# Altium PCB MADI_nRF52840_PCB_L4.PcbDoc (part 3 of 3)
Units mm, origin at the board's own origin, x right, y up, seen from the top; angles counter-clockwise.
Board outline 30 x 21.59 mm, 4 copper layers (L1, L2 (GND), L3 (GND), L4), stack 1.525 mm thick; 59 components, 58 nets, 307 pads, 195 vias.
Unrouted connection lines stored in the file: 114.
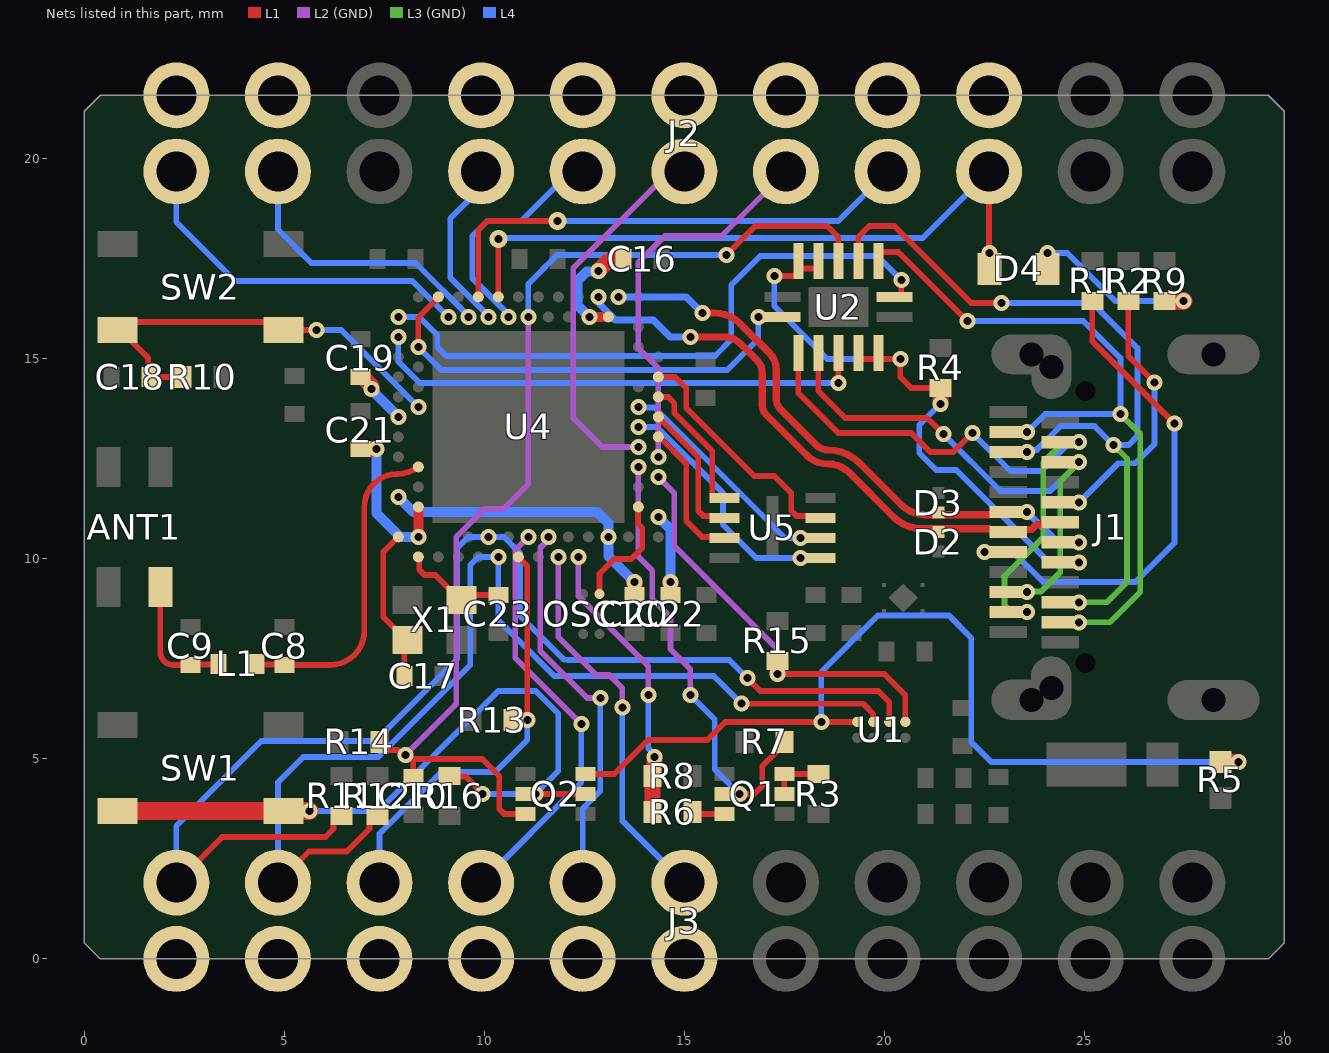
[diagram p4: the nets of this part, all layers, seen from the top]

## Via types
v1: diameter 0.4, hole 0.2, L1 to L4, tented both sides, 193 vias
v2: diameter 0.45, hole 0.2, L1 to L4, tented both sides, 2 vias

## Nets (pads, with @x,y where several pads share a name; then routed paths per layer and width w, separated by ;. In a path a pad name is that pad's centre, name@x,y a point inside that pad or via, vN(x,y) a via of type N, cw(c..) or ccw(c..) an arc to the next point about the centre after c; other vN are vias at no path point) (continued)
MR: Q2.6 R5.2 U1.D1 | length 23.1
  L1 w0.146: Q2.6@12.525,4.625 13.25,4.625 14.1,5.475 15.575,5.475 16.025,5.925 U1.D1@19.325,5.925
  L1 w0.4: R5.2@28.4,4.925 v1(28.85,4.925)
  L4 w0.146: v1(18.425,5.925) 18.425,7.172 19.842,8.589 21.611,8.589 22.175,8.025 22.175,5.425 22.675,4.925 v1(28.85,4.925)
NetANT1_1: ANT1.1 C9.2 L1.2 | length 3.3
  L1 w0.146: ANT1.1@1.9,9.295 1.9,7.675 ccw(c2.225,7.675) 2.225,7.35 C9.2@2.65,7.35 2.662,7.362 3.337,7.362 L1.2@3.35,7.375
NetC8_2: C8.2 L1.1 U4.H23 | length 8.1
  L1 w0.146: L1.1@4.3,7.375 4.312,7.362 C8.2@4.962,7.362 ; C8.2@5,7.35 6.15,7.35 ccw(c6.15,8.2) 7,8.2 7,11.3 cw(c7.825,11.3) 7.242,11.884 cw(c7.825,11.3) 7.825,12.125 ccw(c7.821,13.002) 8.242,12.233 cw(c8.436,11.883) 8.29,12.256 ccw(c8.236,12.391) 8.346,12.295 U4.H23@8.35,12.3
NetC16_2: C16.2 U4.AC5 | length 2.9
  L1 w0.25: v1(12.625,16.05) U4.AC5@13.1,16.05
  L1 w0.4: v1(12.85,17.2) 13.1,17.45 13.475,17.45 C16.2@13.475,17.5
  L4 w0.25: v1(12.625,16.05) 12.325,16.35 12.325,16.95 12.556,17.181 12.831,17.181 v1(12.85,17.2)
NetC17_1: C17.1 U4.B24 X1.1 | length 3.9
  L1 w0.146: U4.B24@7.85,10.55 7.475,10.175 7.475,8.55 8.05,7.975 X1.1@8.075,7.975 8,7.9 C17.1@8,7.075
NetC19_2: C19.2 U4.N24 | length 1.4
  L1 w0.4: C19.2@6.9,14.55 6.95,14.55 7.175,14.325 v1(7.175,14.25)
  L4 w0.25: v1(7.175,14.25) 7.175,14.237 7.85,13.562 v1(7.85,13.55)
NetC20_2: C20.2 U4.B5 U4.E24 | length 7.6
  L1 w0.4: C20.2@13.75,9.1 v1(13.75,9.425)
  L4 w0.25: v1(7.85,11.55) 8.225,11.175 12.825,11.175 13.1,10.9 13.1,10.075 v1(13.75,9.425)
  other v1: 13.1,10.55
NetC21_2: C21.2 U4.D23 | length 4
  L1 w0.25: v1(8.35,10.55) U4.D23@8.35,11.3
  L1 w0.4: C21.2@6.9,12.75 v1(7.3,12.75)
  L4 w0.25: v1(7.3,12.75) 7.3,11.15 7.9,10.55 v1(8.35,10.55)
NetC22_2: C22.2 U4.C1 | length 2.1
  L1 w0.4: C22.2@14.65,9.1 v1(14.65,9.425)
  L4 w0.25: v1(14.35,11.05) 14.65,10.75 v1(14.65,9.425)
NetC23_1: C23.1 U4.A23 X1.3 | length 2.7
  L1 w0.146: U4.A23@8.35,10.05 8.374,10.026 8.374,9.726 8.5,9.6 8.775,9.6 9.4,8.975 X1.3@9.425,8.975 9.55,9.1 C23.1@10.35,9.1
NetD4_A: D4.A R9.1 | length 4.2
  L1 w0.45: R9.1@27,16.45 v1(27.475,16.45)
  L4 w0.146: v1(24.075,17.65) 24.575,17.65 25.775,16.45 v1@27.35,16.45
NetJ1_A5: J1.A5 R1.2 | length 12.4
  L1 w0.146: R1.2@25.2,16.45 25.2,15.441 27.251,13.39 v1(27.256,13.39)
  L4 w0.146: v1(22.506,10.17) 23.226,10.17 23.971,9.425 26.275,9.425 27.256,10.406 v1(27.256,13.39)
NetJ1_B5: J1.B5 R2.2 | length 6.3
  L1 w0.146: R2.2@26.1,16.45 26.1,15.071 v1(26.756,14.415)
  L4 w0.146: v1(24.87,11.415) 25.845,12.39 26.281,12.39 26.756,12.865 v1(26.756,14.415)
NetOSC1_2: OSC1.2 U4.D2 | length 2.9
  L1 w0.146: OSC1.2@12.88,9.125 12.88,9.63 13.25,10 13.675,10 13.95,10.275 13.95,10.775 13.85,10.875 U4.D2@13.85,11.3
NetQ1_3: Q1.3 R6.2 | length 0.8
  L1 w0.146: R6.2@15.2,3.675 15.25,3.625 Q1.3@16,3.625
NetQ1_5: Q1.5 Q1.6 R3.1 | length 1.3
  L1 w0.146: Q1.5@17.5,4.125 Q1.6@17.5,4.625 R3.1@18.35,4.625
NetQ2_2: Q2.2 Q2.5 R16.2 SW1.1 SW1.2 | length 18.4
  L1 w0.146: R16.2@9.125,4.575 9.137,4.563 9.537,4.563 9.95,4.15 v1(9.95,4.125) ; v1(11.275,4.125) Q2.5@12.525,4.125
  L1 w0.45: SW1.2@0.825,3.7 SW1.1@4.975,3.7 v1(5.625,3.7)
  L4 w0.146: v1(5.625,3.7) 7.35,3.7 10.35,6.7 11.287,6.7 11.85,6.137 11.85,4.7 v1(11.275,4.125) v1(9.95,4.125)
nRESET: C10.2 Q2.3 R14.1 U2.4 U4.AC13 | length 27.8
  L1 w0.146: R14.1@7.375,5.425 7.375,5.375 7.525,5.225 7.832,5.225 7.957,5.1 8.05,5.1 8.225,4.925 ; C10.2@8.225,4.55 8.225,5 9.95,5 10.375,4.575 10.375,3.75 10.5,3.625 Q2.3@11.025,3.625 ; v1(16.05,17.6) 16.775,18.325 18.575,18.325 18.85,18.05 U2.4@18.85,17.45
  L2 (GND) w0.146: v1(8.025,5.1) 9.3,6.375 9.3,10.55 10,11.25 10.475,11.25 11.1,11.875 v1(11.1,16.05)
  L4 w0.146: v1(11.1,16.05) 11.1,16.875 11.45,17.225 11.45,17.23 11.67,17.45 11.675,17.45 11.825,17.6 v1(16.05,17.6)
nRESET_SW: J1.A10 J1.B10 U2.3 | length 19.4
  L1 w0.146: U2.3@19.35,17.45 19.35,18.05 19.625,18.325 20.25,18.325 22.175,16.4 v1(22.925,16.4)
  L3 (GND) w0.146: v1(24.87,8.915) 25.565,8.915 26.066,9.416 26.066,12.51 v1(25.731,12.845)
  L4 w0.146: v1(22.925,16.4) 25.2,16.4 26.326,15.274 26.326,13.064 26.106,12.845 v1(25.731,12.845) 25.256,13.32 24.406,13.32 23.813,12.727 23.622,12.727 v1(23.57,12.675)
P0.03/SPI_MOSI: J3.8 U4.B13 | length 10.6
  L2 (GND) w0.146: v1(11.1,10.55) 10.775,10.225 10.775,7.525 v1(12.425,5.875)
  L4 w0.146: J3.8@10.054,1.905 J3.8@9.92,1.905 12.425,4.41 v1(12.425,5.875)
P0.04/AIN2: J2.5 U4.J1 | length 9.7
  L2 (GND) w0.146: v1(14.35,12.55) 14.35,14.774 13.85,15.274 13.85,17.412 14.513,18.075 15.93,18.075 J2.5@17.54,19.685
P0.05/AIN3: J2.6 U4.K2 | length 9.4
  L2 (GND) w0.146: v1(13.85,12.8) 12.95,12.8 12.225,13.525 12.225,17.275 14.635,19.685 J2.6@15,19.685
P0.19: J2.7 U4.AC15 | length 5.8
  L4 w0.146: v1(10.6,16.05) 10.6,16.116 9.7,17.016 9.7,18.075 10.075,18.45 10.925,18.45 12.16,19.685 J2.7@12.46,19.685
P0.20: D4.K J2.3 U4.AD16 | length 16.5
  L1 w0.146: U4.AD16@10.35,16.55 v2(10.35,18) ; v1@22.6,17.65 22.62,17.67 J2.3@22.62,19.685
  L4 w0.146: v2(10.35,18) 10.375,18.025 20.96,18.025 J2.3@22.62,19.685
  other v1: 22.625,17.65
P0.21: J2.8 U4.AC17 | length 4.3
  L4 w0.146: J2.8@9.92,19.685 9.92,19.279 9.15,18.509 9.15,17.03 10.1,16.08 v1(10.1,16.05)
P0.22: J2.4 U4.AD18 | length 12.5
  L1 w0.146: U4.AD18@9.85,16.55 9.85,18.225 10.075,18.45 v2(11.825,18.45)
  L4 w0.146: v2(11.825,18.45) 18.845,18.45 J2.4@20.08,19.685
P0.23/UART_TX: J2.10 U4.AC19 | length 7.1
  L4 w0.146: J2.10@4.84,19.685 4.84,18.235 5.675,17.4 8.28,17.4 9.6,16.08 v1(9.6,16.05)
P0.25/UART_RX: J2.11 U4.AC21 | length 9
  L4 w0.146: J2.11@2.3,19.685 2.3,18.425 3.775,16.95 8.2,16.95 v1(9.1,16.05)
P0.26/nIRQ_BQ: R15.1 U1.A1 U4.G1 | length 10.6
  L1 w0.146: v1(17.325,7.125) 20,7.125 20.525,6.6 U1.A1@20.525,5.925
  L1 w0.4: v1(17.325,7.125) R15.1@17.325,7.45
  L2 (GND) w0.146: v1(14.35,12.05) 14.75,11.65 14.75,10.325 17.325,7.75 v1(17.325,7.125)
P0.27/EN_VBAT_MON: Q1.2 R7.2 U4.H2 | length 11.6
  L1 w0.146: v1(16.375,4.125) 16.75,4.125 16.95,4.325 16.95,4.825 17.5,5.375 R7.2@17.5,5.425
  L1 w0.35: Q1.2@16,4.125 v1(16.375,4.125)
  L2 (GND) w0.146: v1(13.85,12.3) 13.85,10.063 14.2,9.713 14.2,9 14.651,8.549 14.651,7.749 15.15,7.25 v1(15.15,6.6)
  L4 w0.146: v1(15.15,6.6) 15.763,5.987 15.763,4.737 v1(16.375,4.125)
P0.28/SPI_CLK: J3.7 U4.B11 | length 9.7
  L2 (GND) w0.146: v1(11.6,10.55) 11.6,10.482 11.4,10.282 11.4,7.7 12.575,6.525 v1(12.9,6.525)
  L4 w0.146: J3.7@12.46,1.905 12.46,3.76 12.9,4.2 v1(12.9,6.525)
P0.29/SPI_MISO: J3.6 U4.A10 | length 9.6
  L2 (GND) w0.146: v1(11.85,10.05) 11.85,8.05 12.8,7.1 13.125,7.1 13.45,6.775 v1(13.45,6.28)
  L4 w0.146: v1(13.45,6.28) 13.45,3.455 J3.6@15,1.905
P0.31/VBAT_MON: R6.1 R8.2 U4.A8 | length 7.2
  L1 w0.4: R6.1@14.2,3.625 14.2,4.525 14.225,4.55 14.225,4.767 14.25,4.792 v1@14.25,5
  L2 (GND) w0.146: v1(12.35,10.05) 12.35,9.075 14.1,7.325 v1(14.1,6.6)
  L4 w0.146: v1(14.1,6.6) 14.1,5.268 14.25,5.118 v1(14.25,5.05)
P1.07/BUTTON: C18.2 R10.1 SW2.1 SW2.2 U4.P23 | length 11.1
  L1 w0.146: R10.1@2.45,14.55 C18.2@1.625,14.55 1.6,14.575 1.6,15.025 0.9,15.725 0.725,15.725 0.925,15.925 4.675,15.925 4.875,15.725 SW2.1@4.975,15.725 v1(5.8,15.725)
  L4 w0.146: v1(5.8,15.725) 6.425,15.725 v1(8.35,13.8)
P1.12/I2C_SCL: J3.11 R11.1 U1.B1 U4.B17 | length 31.9
  L1 w0.146: J3.11@2.3,1.905 3.445,3.05 6.027,3.05 6.232,3.255 6.232,3.426 6.404,3.598 R11.1@6.428,3.598 ; v1(16.575,7.025) 16.9,6.7 19.85,6.7 20.125,6.425 U1.B1@20.125,5.925
  L4 w0.146: J3.11@2.3,1.905 2.3,3.325 4.425,5.45 7.276,5.45 9.325,7.499 9.325,10.275 9.6,10.55 10.491,10.55 10.9,10.141 10.9,8.575 11.9,7.575 11.996,7.479 12.096,7.479 12.1,7.475 16.125,7.475 v1(16.575,7.025)
  other v1: 10.1,10.55
P1.13/I2C_SDA: J3.10 R12.1 U1.C1 U4.A16 | length 27.2
  L1 w0.146: J3.10@4.84,1.905 5.619,2.684 6.559,2.684 7.128,3.253 7.128,3.425 7.324,3.62 R12.1@7.325,3.62 ; v1@16.425,6.375 v1(16.43,6.38) 19.47,6.38 19.725,6.125 U1.C1@19.725,5.925
  L4 w0.146: J3.10@4.84,1.905 4.84,4.415 5.475,5.05 7.35,5.05 9.65,7.35 9.65,9.85 9.85,10.05 v1(10.35,10.05) 10.35,8.475 11.75,7.075 15.735,7.075 v1(16.43,6.38)
P1.15/SPI_nCS: J3.9 R13.1 U4.A14 | length 10.9
  L1 w0.146: U4.A14@10.85,10.05 11.075,9.825 v1(11.075,5.975)
  L1 w0.4: R13.1@10.7,5.975 v1(11.075,5.975)
  L4 w0.146: J3.9@7.38,1.905 7.38,3.13 8.925,4.675 10.275,4.675 11.075,5.475 v1(11.075,5.975)
QSPI_DATA0: U4.R1 U5.5 | length 3.5
  L1 w0.146: U4.R1@14.35,14.05 14.6,14.05 14.75,13.9 14.75,13.651 15.7,12.701 15.7,11.577 15.752,11.525 U5.5@16,11.525
QSPI_DATA1: U4.P2 U5.2 | length 5.4
  L4 w0.146: v1(13.85,13.8) 13.863,13.787 14.252,13.787 17.514,10.525 v1(17.9,10.525)
QSPI_DATA2: U4.U1 U5.3 | length 6.1
  L1 w0.146: U4.U1@14.35,14.55 14.775,14.55 15.05,14.275 15.05,13.775 16.75,12.075 17.25,12.075 17.675,11.65 17.675,11.2 17.798,11.077 18.348,11.077 U5.3@18.4,11.025
QSPI_DATA3: U4.L1 U5.7 | length 3.5
  L1 w0.146: U4.L1@14.35,13.05 14.38,13.05 15.05,12.38 15.05,10.95 15.45,10.55 15.975,10.55 U5.7@16,10.525
QSPI_nCS: U4.M2 U5.1 | length 5.9
  L4 w0.146: v1(13.85,13.3) 14.315,13.3 15.964,11.652 15.964,10.861 16.8,10.025 v1(17.9,10.025)
QSPI_SCK: U4.N1 U5.6 | length 3.5
  L1 w0.146: U4.N1@14.35,13.55 15.35,12.55 15.35,11.2 15.473,11.077 15.948,11.077 U5.6@16,11.025
SW_CONTROL: J1.B8 R4.2 U2.5 U2.6 U2.12 U2.13 | length 16.1
  L1 w0.146: v1(17.25,17.075) 17.798,17.075 17.798,17.398 U2.6@17.85,17.45 17.85,17.398 17.85,17.312 17.902,17.26 18.298,17.26 18.35,17.312 U2.5@18.35,17.45 ; U2.12@19.35,15.15 19.35,15.05 19.4,15 19.8,15 U2.13@19.85,15.05 ; U2.13@19.85,15.15 U2.13@19.85,15.05 ; R4.2@21.4,14.275 20.675,14.275 20.4,14.55 v1(20.4,15) 19.9,15 U2.13@19.85,15.05
  L1 w0.4: v1(21.4,13.875) R4.2@21.4,14.275
  L4 w0.146: v1(17.25,17.075) 17.25,16.325 18.575,15 v1(20.4,15) ; v1(21.4,13.875) 20.875,13.35 20.875,12.65 21.3,12.225 21.8,12.225 24.11,9.915 v1(24.87,9.915)
SWDCLK: U2.11 U4.AA24 | length 12.6
  L1 w0.146: v1(18.85,14.4) U2.11@18.85,15.15
  L4 w0.146: v1(7.85,15.55) 7.85,14.938 8.388,14.4 v1(18.85,14.4)
SWDCLK_SW: J1.A3 J1.B3 U2.10 | length 12.8
  L1 w0.146: U2.10@18.35,15.15 18.35,14.2 19.025,13.525 21.075,13.525 v1(21.475,13.125)
  L3 (GND) w0.146: v1(23.57,9.175) 23.579,9.184 23.92,9.184 24.4,9.664 24.4,11.945 v1@24.87,12.415
  L4 w0.146: v1(21.475,13.125) 22.903,11.697 24.147,11.697 v1(24.867,12.418)
SWDIO: U2.1 U4.AC24 | length 15.8
  L1 w0.146: U2.1@20.25,16.55 20.375,16.55 20.425,16.6 v1(20.425,16.975)
  L4 w0.146: v1(7.85,16.05) 8.375,16.05 8.825,15.6 8.825,15.3 9.05,15.075 15.765,15.075 16.175,15.485 16.175,16.85 16.9,17.575 19.825,17.575 v1(20.425,16.975)
SWDIO_SW: J1.A11 J1.B11 U2.2 | length 17.8
  L1 w0.146: U2.2@19.85,17.45 19.85,17.625 19.9,17.675 20.35,17.675 v1(22.075,15.95)
  L3 (GND) w0.146: v1(24.87,8.415) 25.64,8.415 26.4,9.175 26.4,13.126 v1(25.906,13.62)
  L4 w0.146: v1(22.075,15.95) 24.975,15.95 25.906,15.019 ; v1(23.57,13.175) 24.015,13.62 v1(25.906,13.62) 25.906,15.03
SWO: U2.8 U4.AD22 U4.Y23 | length 11.4
  L1 w0.146: v1(8.35,15.3) 8.35,16.037 8.85,16.537 U4.AD22@8.85,16.55 ; v1@16.95,16.1 17.25,16.1 U2.8@17.3,16.05
  L4 w0.146: v1(8.35,15.3) 8.925,14.725 16.075,14.725 16.85,15.5 v1(16.85,16.05)
SWO_SW: J1.A2 J1.B2 U2.9 | length 15.2
  L1 w0.146: U2.9@17.85,15.15 17.85,14.15 18.85,13.15 20.675,13.15 21.15,12.675 21.725,12.675 v1(22.2,13.15)
  L3 (GND) w0.146: v1(23.57,8.675) 23.176,8.675 23.006,8.845 23.006,9.57 23.975,10.539 23.975,12.414 24.481,12.92 24.865,12.92 v1@24.87,12.915
  L4 w0.146: v1(22.2,13.15) 23.153,12.197 23.922,12.197 24.604,12.879 24.829,12.879 v1(24.867,12.918)
USB_D_N: D3.1 J1.A7 J1.B7 U4.AD4 | length 14.1
  L1 w0.18: v1(15.45,16.15) 15.754,16.15 cw(c15.754,15.254) 16.387,15.888 17.123,15.152 ; 17.123,15.152 cw(c16.696,14.725) 17.3,14.725 17.3,13.998 ccw(c17.671,13.998) 17.409,13.736 18.3,12.845 ccw(c18.59,13.136) 18.59,12.725 cw(c18.59,11.614) 19.374,12.401 cw(c18.59,11.614) 19.376,12.399 cw(c18.59,11.614) 19.377,12.398 19.384,12.39 ; 19.385,12.39 19.386,12.389 cw(c19.259,12.261) 19.387,12.388 19.404,12.371 20.428,11.347 ; 20.428,11.347 ccw(c21.009,11.929) 21.009,11.106 22.621,11.106 22.627,11.113 23.038,11.113 J1.A7@23.1,11.175
  L4 w0.18: v1(13.35,16.55) 15.05,16.55 v1(15.45,16.15) ; v1(23.57,11.175) 24.33,10.415 v1(24.87,10.415)
USB_D_P: D2.1 J1.A6 J1.B6 U4.AD6 | length 14.7
  L1 w0.18: v1(15.15,15.55) 16.004,15.55 cw(c16.004,15.004) 16.39,15.39 16.823,14.957 cw(c16.515,14.65) 16.95,14.65 16.95,13.845 ccw(c17.3,13.845) 17.052,13.598 17.178,13.472 18.052,12.598 ; 18.053,12.597 ccw(c18.59,13.136) 18.59,12.375 cw(c18.59,11.614) 19.128,12.152 20.232,11.048 ccw(c20.937,11.754) 20.937,10.756 22.608,10.756 22.627,10.737 23.038,10.737 J1.A6@23.1,10.675 23.162,10.737 23.684,10.737 23.799,10.853 24.338,10.853 J1.B6@24.4,10.915
  L4 w0.18: v1(12.85,16.55) 12.892,16.508 12.892,16.358 13.275,15.975 14.225,15.975 14.65,15.55 v1(15.15,15.55)
pads on no net: J1.0 J1.A8 U4.A12 U4.A18 U4.A20 U4.AB2 U4.AC9 U4.AC11 U4.AD8 U4.AD10 U4.AD12 U4.AD20 U4.B3 U4.B9 U4.B15 U4.B19 U4.J24 U4.L24 U4.R24 U4.T2 U4.T23 U4.U24 U4.V23 U4.W24 U5.9

## Polygon pours and split planes (outlines as drawn)
+VIN_5V0 on L1 "NONET_L-01_P-001" (solid, remove dead copper, pour order 50): 13.85,16.688 15.125,16.688 15.394,16.956 15.841,16.509 15.744,16.412 13.85,16.412
P0.26/nIRQ_BQ on L1 "NONET_L-01_P-001" (solid, remove dead copper, pour order 49): 17.6,7.675 17.6,7.225 17.7,7.125 17.325,7.125 17.325,7.675
+3V3 on L1 "NONET_L-01_P-001" (solid, remove dead copper, pour order 47): 11.843,5.9 11.362,5.418 12.325,5.418
+3V3 on L1 "NONET_L-01_P-001" (solid, remove dead copper, pour order 46): 16.454,8.454 16.454,7.904 16.775,8.225 17.6,8.225 17.6,8.675 17.825,8.9 18.025,8.9 18.025,9.3 16.973,9.3 16.687,9.586 16.375,9.898 16.375,10.152 15.398,10.152 14.863,10.687 14.35,10.687 14.35,10.18 14.605,9.925 15.075,9.925 15.3,9.7 15.3,8.9 16.009,8.9
GND on L1 "NONET_L-01_P-001" (solid, remove dead copper, pour order 45): 12.897,7.647 13.005,7.755 13.005,7.886 13.005,8.125 12.88,8.25 12.47,8.25 12.345,8.125 12.345,7.886 12.345,7.775 12.473,7.647
GND on L1 "NONET_L-01_P-001" (solid, remove dead copper, pour order 44): 9.05,7.625 8.75,7.325 8.75,6.825 8.875,6.7 10.025,6.7 10.7,7.375 10.7,8.35 9.075,8.35 9.05,8.325
+3V3 on L1 "NONET_L-01_P-001" (solid, remove dead copper, pour order 7): 6.6,4.905 6.705,4.8 7.6,4.8 7.6,4.35 7.599,4.351 6.153,4.351 6.153,4.801 5.805,5.15 0.6,5.15 0.225,5.525 0.225,6.3 9.875,6.3 9.925,6.25 9.925,5.7 10.051,5.574 11.374,5.574 10.978,5.178 8.622,5.178 7.9,5.9 6.7,5.9 6.6,5.8
+VSYS on L1 "NONET_L-01_P-001" (solid, remove dead copper, pour order 0): 21.225,4.825 21.075,4.975 20.75,4.975 20.24,5.485 20.24,5.525 20.01,5.525 20.01,4.44 20.175,4.275 21.225,4.275
GND on L1 "NONET_L-01_P-001" (solid, remove dead copper, pour order 3): 18.85,5 18.85,4.375 18.95,4.275 19.325,4.275 19.44,4.39 19.44,5.525 19.325,5.64 18.665,5.64 18.575,5.55 18.575,5.275
+VBAT on L1 "NONET_L-01_P-001" (solid, remove dead copper, pour order 4): 19.125,2.035 19.125,3.05 18.775,3.4 17.3,3.4 17.25,3.45 17.25,3.8 17.3,3.85 19.175,3.85 19.61,4.285 19.61,5.525 19.84,5.525 19.84,4.285 20.25,3.875 21.225,3.875 21.225,2.225 20.905,1.905 19.255,1.905
+VIN_5V0 on L1 "NONET_L-01_P-001" (solid, remove dead copper, pour order 5): 24.525,3.75 25.15,3.75 25.65,3.25 26.05,3.65 26.05,5.405 25.815,5.64 20.525,5.64 20.525,5.41 20.915,5.41 21.325,5 22.35,5 22.6,4.75 22.6,4.35 23.925,4.35
GND on L1 "NONET_L-01_P-001" (solid, remove dead copper, pour order 6): 22.175,4.775 22.175,4.225 22.6,3.8 23.1,3.8 23.445,3.455 23.445,1.905 21.795,1.905 21.775,1.925 21.775,4.775
GND on L1 "NONET_L-01_P-001" (solid, remove dead copper, pour order 8): 22.63,7.76 22.63,8.327 23.57,8.327 23.83,8.067 24.87,8.067 24.87,7.762 24.684,7.577 24.684,6.114 24.525,5.955 21.325,5.955 21.225,6.055 21.225,6.355
GND on L1 "NONET_L-01_P-001" (solid, remove dead copper, pour order 12): 26.375,17.225 24.925,17.225 24.925,17.675 25.3,18.05 26,18.05 26.375,17.675
GND on L1 "NONET_L-01_P-001" (solid, remove dead copper, pour order 17): 22.681,13.975 22.381,13.675 22.534,13.523 23.67,13.523 23.93,13.263 24.87,13.263 24.87,13.567 24.681,13.756 24.681,15.113 22.681,15.113
+VBUS on L1 "NONET_L-01_P-001" (solid, remove dead copper, pour order 18): 23.938,9.567 23.93,9.56 23.93,9.262 25.267,9.262 25.95,8.58 25.95,5.875 26.55,5.275 26.55,4.425 27.35,4.425 27.35,5.625 26.85,6.125 26.85,11.375 26.158,12.067 23.893,12.067 23.898,12.062 23.898,11.762 25.567,11.762 25.95,11.38 25.95,9.905 25.612,9.567
GND on L1 "NONET_L-01_P-001" (solid, remove dead copper, pour order 32): 18.025,8.35 18.025,7.675 18.27,7.43 20.25,7.43 20.25,7.93 20.265,7.944 20.265,8.68 20.115,8.83 19.875,8.83 19.875,8.488 19.737,8.35
+VSYS on L1 "NONET_L-01_P-001" (solid, remove dead copper, pour order 33): 21.211,9.65 21.25,9.611 21.25,8.375 21.25,7.1 21.2,7.05 20.85,7.05 20.8,7.1 20.8,8.35 20.685,8.465 20.685,8.68 20.835,8.83 20.835,9.22 20.685,9.37 20.685,9.585 20.75,9.65
GND on L1 "NONET_L-01_P-001" (solid, remove dead copper, pour order 37): 7.975,3.8 7.975,3.2 8.325,2.85 9.05,2.85 9.4,3.2 9.4,3.8
nRESET on L1 "NONET_L-01_P-001" (solid, remove dead copper, pour order 38): 8.475,4.827 8.624,4.976 8.575,5.025 7.9,5.7 7.15,5.7 7.15,5.15 7.6,5.15 7.975,4.775 7.975,4.35 8.475,4.35
GND on L1 "NONET_L-01_P-001" (solid, remove dead copper, pour order 40): 20.306,8.488 20.306,7.985 20.265,7.944 19.875,8.334 19.875,8.83 19.912,8.83 20.475,9.393 20.843,9.025
+3V3 on L1 "NONET_L-01_P-001" (solid, remove dead copper, pour order 41): 19.795,8.9 18.725,8.9 18.725,9.275 19.1,9.65 20.225,9.65 20.265,9.61 20.265,9.37
+3V3 on L4 "NONET_L-01_P-001" (solid, remove dead copper, pour order 48): 18.725,12.325 18.225,12.825 19.225,12.825
+3V3 on L4 "NONET_L-01_P-001" (solid, remove dead copper, pour order 42): 8.85,10.05 8.225,10.05 8.85,9.425
+3V3 on L4 "NONET_L-01_P-001" (solid, remove dead copper, pour order 28): 18.725,9.1 17.85,9.1 18.725,9.975
+VSYS on L4 "NONET_L-01_P-001" (solid, remove dead copper, pour order 29): 20.175,5.05 20.175,4.1 20.55,3.725 23.375,3.725 24.335,2.765 24.335,1.905 25.985,1.905 25.985,3.04 24.75,4.275 20.9,4.275 20.575,4.6 20.575,5.05
GND on L2 (GND) "NONET_L-01_P-001" (solid, remove dead copper, pour order 23): -2.5,25 -2.5,-2.5 32.5,-2.5 32.5,25
GND on L3 (GND) "NONET_L-01_P-001" (solid, remove dead copper, pour order 24): -2.5,25 -2.5,-2.5 32.5,-2.5 32.5,25

## Keep-outs
Keep-Out Layer:
  text ".Layer_Name" at 22,-15.5 h1.52

## Other copper
L1:
  rectangle net GND: 21.55,5.955 22.325,6.25
  text ".Layer_Name" at 22,-15.5 h1.52
L2 (GND):
  text ".Layer_Name" at 22,-15.5 h1.52
L3 (GND):
  text ".Layer_Name" at 22,-15.5 h1.52
L4:
  text ".Layer_Name" at 22,-15.5 h1.52
Multi-Layer:
  pour cut-out: 6,12.795 6,8.795 0,8.795 0,12.795

## Silkscreen, mask and mechanical layers (free items; w line width, h text height)
Top Overlay:
  region: 115.3,51.8
  text ".VersionRevision" at 27.973,16.372 h1.5
  text ".Layer_Name" at 22,-15.5 h1.52
Bottom Overlay:
  text "RX" at 1.746,16.775 h1.5 r270
  text "TX" at 4.286,16.75 h1.5 r270
  text "0.05" at 14.446,15.946 h1.5 r270
  text "0.20" at 22.066,15.945 h1.5 r270
  text "GND" at 24.606,15.94 h1.5 r270
  text "3V3" at 27.146,15.94 h1.5 r270
  text "0.04" at 16.986,15.928 h1.5 r270
  text "BOOT" at 0.575,15.838 h1.5 r180
  text "GND" at 6.826,15.822 h1.5 r270
  text "0.21" at 9.366,15.822 h1.5 r270
  text "0.19" at 11.906,15.822 h1.5 r270
  text "0.22" at 19.526,15.822 h1.5 r270
  text "`" at 9.743,7.201 h15 r270
  text "nRF52840" at 6.921,6.935 h2.5 r270
  text "RST" at 0.668,6.888 h1.5 r180
  text "SCL" at 1.871,3.1 h1.5 r270
  text "SDA" at 4.412,3.1 h1.5 r270
  text "nCS" at 6.951,3.1 h1.5 r270
  text "MOSI" at 9.492,3.101 h1.5 r270
  text "SCK" at 12.031,3.1 h1.5 r270
  text "MISO" at 14.572,3.101 h1.5 r270
  text "GND" at 16.998,3 h1.5 r270
  text "BAT" at 19.551,3 h1.5 r270
  text "GND" at 22.078,3 h1.5 r270
  text "SYS" at 24.618,3 h1.5 r270
  text "VIN" at 27.159,3 h1.5 r270
  text ".Layer_Name" at 22,-15.5 h1.52
Top Paste:
  text ".Layer_Name" at 22,-15.5 h1.52
Bottom Paste:
  text ".Layer_Name" at 22,-15.5 h1.52
Top Solder:
  text ".Layer_Name" at 22,-15.5 h1.52
Bottom Solder:
  text ".Layer_Name" at 22,-15.5 h1.52
Drill Guide:
  text ".Layer_Name" at 22,-15.5 h1.52
Board Outline:
  the board outline again, w0
  text ".Layer_Name" at 22,-15.5 h1.52
Top Assembly:
  text "COMPONENTS MARKED 'DNP' SHOULD NOT BE POPULATED." at 0,-7.001 h1.52
  text ".Layer_Name" at 22,-15.5 h1.52
Bottom Assembly:
  text "COMPONENTS MARKED 'DNP' SHOULD NOT BE POPULATED." at 131,-7.001 h1.52
  text ".Layer_Name" at 22,-15.5 h1.52
Top Courtyard:
  text ".Layer_Name" at 22,-15.5 h1.52
Bottom Courtyard:
  text ".Layer_Name" at 22,-15.5 h1.52
Top 3D Body:
  text ".Layer_Name" at 22,-15.5 h1.52
Bottom 3D Body:
  text ".Layer_Name" at 22,-15.5 h1.52
Top Designator:
  text ".Layer_Name" at 22,-15.5 h1.52
Bottom Designator:
  text ".Layer_Name" at 22,-15.5 h1.52
Gerber Information:
  lines w0.1: 0,-17 111,-17 ; 0,-12.5 131,-12.5 ; 55,-21.5 55,-8 ; 111,-21.5 111,-8 ; 0,-21.5 0,-8 131,-8 131,-21.5 0,-21.5
  text "ALL ARTWORK VIEWED FROM TOP SIDE" at 2,-11 h1.52
  text "PRJ TITLE =" at 57.5,-11 h1.52
  text ".Project" at 76,-11 h1.52
  text "REV =" at 113,-11 h1.52
  text ".VersionRevision" at 122.5,-11 h1.52
  text "LAYER NAME =" at 2,-15.5 h1.52
  text "PRJ # =" at 57.5,-15.5 h1.52
  text ".ProjectNumber" at 70,-15.5 h1.52
  text "DRAWN BY" at 113,-15.5 h1.52
  text ".DrawnBy" at 115.5,-19.5 h1.52
  text "CONTACT =" at 2,-20 h1.52
  text ".Contact" at 17.5,-20 h1.52
  text "GENERATED =" at 57.5,-20 h1.52
  text ".Print_Date" at 76.5,-20 h1.52
  text ".Print_Time" at 94,-20 h1.52
Fab Notes:
  lines w0.2: 2.3,0 33.605,0 32.285,1.32 32.285,0.02 ; 2.3,21.59 33.605,21.59 32.285,22.91 32.285,21.61 ; 34.595,10.895 34.595,12.195 33.275,10.875 57.575,10.875
  lines w2.5: 31.25,5.795 31.25,15.795
  text "TYPE;" at 103.325,125.203 h2.54
  text "Impedance;" at 116.025,125.203 h2.54
  text "Layer (Reference);" at 136.345,125.176 h2.54
  text "Width (um);" at 171.905,125.176 h2.54
  text "Gap (um);" at 194.765,125.175 h2.54
  text "50 ohm;" at 116.025,122.657 h2.54
  text "146;" at 171.905,122.657 h2.54
  text "SE;" at 103.325,122.635 h2.54
  text "L1(L2), L4(L3);" at 136.345,122.636 h2.54
  text "DIFF;" at 103.325,120.163 h2.54
  text "90 ohm;" at 116.025,120.157 h2.54
  text "180;" at 171.905,120.157 h2.54
  text "170;" at 194.805,120.157 h2.54
  text "L1(L2), L4(L3);" at 136.345,120.136 h2.54
  text "Files / *.GTO - Top Overlay / *.GTP - Top Paste / *.GTS - Top Solder / *.GTL - L1 / *.G1 - L2 (GND) / *.G2  - L3 / *.GBL - L4 / *.GBS - Bottom Solder / *.GBP - Bottom Paste / *.GBO - Bottom Overlay / *.GM1 - Board Outline / *.GM12 - Fab Notes / *.GM13 - Vil Filling / *.GD1 - Drill Drawing / *.GG1 - Drill Guide /  / Layer Stack Table: JLC3313" at 0,108.335 h2.54
  text "BOARD INFORMATION /  / Minimum Track: 146um / Minimum Gap: 100um / Minimum Through Hole VIA: 0.20mm (drill). Drilling: L1-L4 /  / 1. REMOVE ALL NON-FUNCTIONAL INNER LAYER PADS. /  / 2. THIS BOARD CONTAINS IMPEDANCE CONTROLLED TRACKS, TRACK AND GAP SIZES ARE AS FOLLOWS: /  /  /  /  /  /  /  / 3. FINISHED PANEL THICKNESS IS NOT CRITICAL: TO BE APPROXIMATELY 1.6mm /  / 4. SURFACE FINISH: Immersion Gold (ENIG) /  / 5. SOLDER RESIST: APPLY TO BOTH SIDES COLOR - BLUE /  / 6. COMPONENT IDENT: COLOR TO BE WHITE /  / 7. PANEL BY PCB MANUFACTURER /  / 8. VIA MARKED IN (Filling) LAYER SHOULD BE VIA FILLING BY IPC-4761 (Type V Via)" at 100,92.698 h2.54
  text "Castellated edges" at 34.035,21.671 h1.52
  text "This slot must be in a panel design." at 35.775,11.561 h1.52
  text "Castellated edges" at 34.035,0.081 h1.52
  text ".Layer_Name" at 22,-15.5 h1.52
Drill Drawing:
  circle w0.254: c2.556,64.362 r0.847
  lines w0.254: 1.709,55.895 2.556,56.318 3.403,55.895 2.979,56.742 3.403,57.588 2.556,57.165 1.709,57.588 2.133,56.742 1.709,55.895 ; 1.709,61.398 3.403,61.398 2.556,59.705 1.709,61.398 ; 1.709,67.325 3.403,67.325 3.403,69.018 1.709,69.018 1.709,67.325 ; 1.709,71.558 2.133,71.558 2.556,71.135 2.979,71.558 3.403,71.558 2.979,71.982 3.403,72.405 2.979,72.405 2.556,72.828 2.133,72.405 1.709,72.405 2.133,71.982 1.709,71.558 ; 1.709,74.945 1.709,75.368 2.133,75.792 1.709,76.215 1.709,76.638 2.133,76.638 2.556,76.215 2.979,76.638 3.403,76.638 3.403,76.215 2.979,75.792 3.403,75.368 3.403,74.945 2.979,74.945 2.556,75.368 2.133,74.945 1.709,74.945 ; 1.709,79.178 2.133,79.178 2.133,78.755 2.979,78.755 2.979,79.178 3.403,79.178 3.403,80.025 2.979,80.025 2.979,80.448 2.133,80.448 2.133,80.025 1.709,80.025 1.709,79.178
  lines w0.381: 0.191,54.752 196.529,54.752 ; 0.191,81.422 196.529,81.422 ; 14.183,50.942 14.183,85.232 ; 29.419,50.942 29.419,85.232 ; 57.351,50.942 57.351,85.232 ; 70.2,50.942 70.2,85.232 ; 88.838,50.942 88.838,85.232 ; 119.056,50.942 119.056,85.232 ; 134.038,50.942 134.038,85.232 ; 152.981,50.942 152.981,85.232 ; 0.191,50.942 196.529,50.942 196.529,85.232 0.191,85.232 0.191,50.942
  text "Symbol" at 2.476,82.565 h1.83
  text "Count" at 15.326,82.565 h1.83
  text "Hole Size" at 30.562,82.565 h1.83
  text "Plated" at 58.494,82.565 h1.83
  text "Hole Type" at 71.343,82.565 h1.83
  text "Drill Layer Pair" at 89.981,82.565 h1.83
  text "Via/Pad" at 120.199,82.565 h1.83
  text "Pad Shape" at 135.181,82.565 h1.83
  text "Template" at 154.124,82.565 h1.83
  text "161" at 15.326,78.755 h1.52
  text "0.200mm (7.87mil)" at 30.562,78.755 h1.52
  text "PTH" at 58.494,78.755 h1.52
  text "Round" at 71.343,78.755 h1.52
  text "L1 - L4" at 89.981,78.755 h1.52
  text "Via" at 120.199,78.755 h1.52
  text "Rounded" at 135.181,78.755 h1.52
  text "(Mixed)" at 154.124,78.755 h1.52
  text "34" at 15.326,74.945 h1.52
  text "0.200mm (7.87mil)" at 30.562,74.945 h1.52
  text "PTH" at 58.494,74.945 h1.52
  text "Round" at 71.343,74.945 h1.52
  text "L1 - L4" at 89.981,74.945 h1.52
  text "Via" at 120.199,74.945 h1.52
  text "Rounded" at 135.181,74.945 h1.52
  text "v40h20m0mx0" at 154.124,74.945 h1.52
  text "2" at 15.326,71.135 h1.52
  text "0.500mm (19.69mil)" at 30.562,71.135 h1.52
  text "NPTH" at 58.494,71.135 h1.52
  text "Round" at 71.343,71.135 h1.52
  text "L1 - L4" at 89.981,71.135 h1.52
  text "Pad" at 120.199,71.135 h1.52
  text "Rounded" at 135.181,71.135 h1.52
  text "c0hn50m55" at 154.124,71.135 h1.52
  text "2" at 15.326,67.325 h1.52
  text "0.600mm (23.62mil)" at 30.562,67.325 h1.52
  text "PTH" at 58.494,67.325 h1.52
  text "Slot" at 71.343,67.325 h1.52
  text "L1 - L4" at 89.981,67.325 h1.52
  text "Pad" at 120.199,67.325 h1.52
  text "Rounded" at 135.181,67.325 h1.52
  text "(Mixed)" at 154.124,67.325 h1.52
  text "2" at 15.326,63.515 h1.52
  text "0.600mm (23.62mil)" at 30.562,63.515 h1.52
  text "PTH" at 58.494,63.515 h1.52
  text "Slot" at 71.343,63.515 h1.52
  text "L1 - L4" at 89.981,63.515 h1.52
  text "Pad" at 120.199,63.515 h1.52
  text "Rounded" at 135.181,63.515 h1.52
  text "(Mixed)" at 154.124,63.515 h1.52
  text "2" at 15.326,59.705 h1.52
  text "0.600mm (23.62mil)" at 30.562,59.705 h1.52
  text "PTH" at 58.494,59.705 h1.52
  text "Slot" at 71.343,59.705 h1.52
  text "L1 - L4" at 89.981,59.705 h1.52
  text "Pad" at 120.199,59.705 h1.52
  text "Rounded" at 135.181,59.705 h1.52
  text "r230_100h60_190r100m235_105" at 154.124,59.705 h1.52
  text "44" at 15.326,55.895 h1.52
  text "1.000mm (39.37mil)" at 30.562,55.895 h1.52
  text "PTH" at 58.494,55.895 h1.52
  text "Round" at 71.343,55.895 h1.52
  text "L1 - L4" at 89.981,55.895 h1.52
  text "Pad" at 120.199,55.895 h1.52
  text "Rounded" at 135.181,55.895 h1.52
  text "c165h100" at 154.124,55.895 h1.52
  text "247 Total" at 15.326,52.085 h1.52
  text "Slot definitions :" at 2.476,48.403 h1.52
  text "Routed Path Length" at 28.707,48.403 h1.52
  text "= Calculated from tool start centre position to tool end centre position." at 56.715,48.403 h1.52
  text "Hole Length" at 28.707,45.863 h1.52
  text "= Routed Path Length + Tool Size = Slot length as defined in the PCB layout" at 46.304,45.863 h1.52
  text ".Layer_Name" at 22,-15.5 h1.52

## Dimensions
0.4,0 to 0.4,21.59 on Dimensions
0,21.19 to 30,21.19 on Dimensions